# Altium PCB 自己修改盲文板.PcbDoc (part 3 of 4)
Units mm, origin at the board's own origin, x right, y up, seen from the top; angles counter-clockwise.
Board outline 152.4 x 101.6 mm, 4 copper layers (Top Layer, VCC, GND, Bottom Layer); 193 components, 524 nets, 1381 pads, 518 vias.
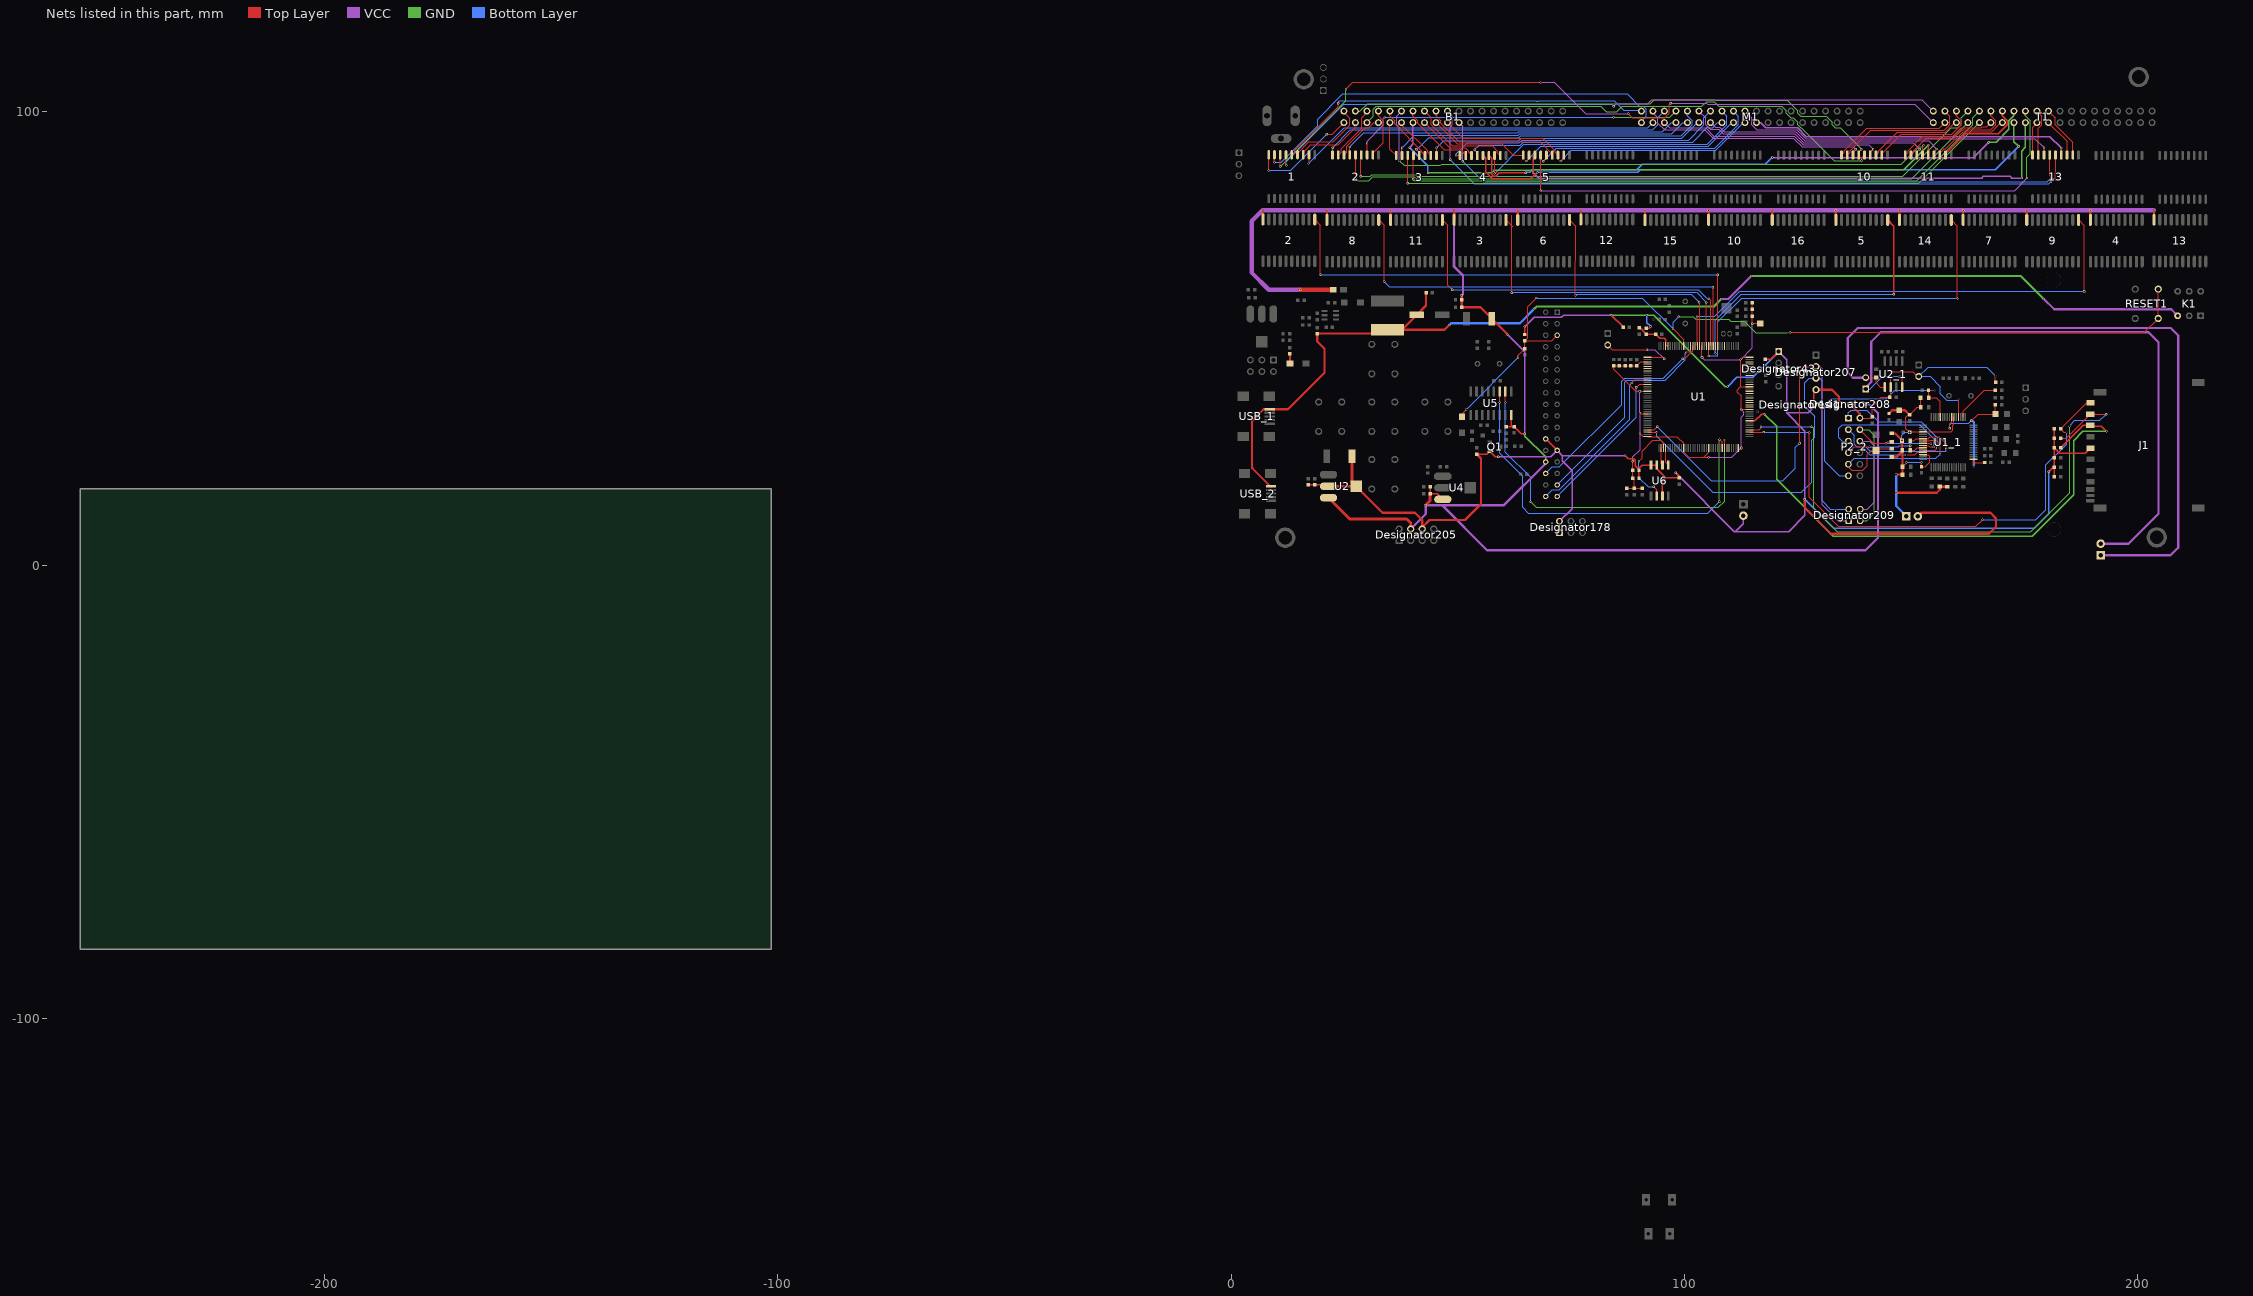
[diagram p5: the nets of this part, all layers, seen from the top]

## Via types
v1: diameter 0.5, hole 0.3, Top Layer to Bottom Layer, 463 vias
v2: diameter 0.5, hole 0.4, Top Layer to Bottom Layer, 48 vias
v3: diameter 1.27, hole 1.016, Top Layer to Bottom Layer, 2 vias
v4: diameter 1, hole 1, Top Layer to Bottom Layer, 2 vias
v5: diameter 3, hole 3, Top Layer to Bottom Layer, tented both sides, 2 vias
v6: diameter 0.8, hole 0.5, Top Layer to Bottom Layer, 1 vias

## Nets (pads, with @x,y where several pads share a name; then routed paths per layer and width w, separated by ;. In a path a pad name is that pad's centre, name@x,y a point inside that pad or via, vN(x,y) a via of type N, cw(c..) or ccw(c..) an arc to the next point about the centre after c; other vN are vias at no path point) (continued)
PA3: Designator135.2 U1.37 | length 17.5
  Top Layer w0.254: Designator135.2@83.058,48.514 84.074,47.498 v1(91.694,47.498) ; U1.37@91.823,45.812 95.158,45.812 v1(95.504,45.466)
  VCC w0.254: v1(91.694,47.498) 93.472,47.498 v1(95.504,45.466)
PA4: U1.40
PA5: U1.41
PA6: U1.42
PA7: U1.43
PA9: U1.101 U5.3 | length 88.5
  Top Layer w0.2: v1(59.207,35.839) U5.3@59.207,38.236 ; v1(107.696,27.686) 108.323,27.059 U1.101@108.323,25.812
  GND w0.254: v1(107.696,13.97) v1(107.696,27.686)
  Bottom Layer w0.2: v1(59.207,35.839) 59.207,24.613 64.262,19.558 64.262,12.7 65.532,11.43 105.156,11.43 v1(107.696,13.97)
PA10: U1.102 U5.2 | length 85.7
  Top Layer w0.2: v1(60.477,35.839) U5.2@60.477,38.236 ; U1.102@108.823,25.812 v1(108.823,27.575)
  GND w0.254: v1(66.04,13.97) 67.31,12.7 107.442,12.7 108.823,14.081 v1(108.823,27.575)
  Bottom Layer w0.2: v1(60.477,35.839) 60.477,24.867 66.04,19.304 v1(66.04,13.97)
PA11: U1.103
PA12: U1.104
PB1: Designator141.34 U1.47 | length 37.5
  Top Layer w0.2: v1(88.367,40.157) 89.021,40.812 U1.47@91.823,40.812
  Bottom Layer w0.2: Designator141.34@69.367,15.113 70.82,16.566 72.358,16.566 87.909,32.117 87.909,39.7 v1(88.367,40.157)
PB6: U1.136
PB9: U1.140
PB10: Designator207.2 Designator209.1 U1.69 | length 103.8
  Top Layer w0.254: U1.69@91.823,29.812 93.312,29.812 v1(93.98,30.48) ; v2(125.374,26.848) 125.374,42.85 126.263,43.739 Designator207.2@128.981,43.739
  VCC w0.254: Designator207.2@128.981,43.739 129.896,43.739 130.327,43.307 130.327,13.259 133.833,9.754 Designator209.1@136.195,9.754
  Bottom Layer w0.254: v1(93.98,30.48) 105.918,18.542 121.666,18.542 124.46,21.336 124.46,25.933 v2(125.374,26.848)
PB11: Designator207.3 Designator209.2 U1.70 | length 103.9
  Top Layer w0.254: U1.70@91.823,29.312 v1(93.828,29.312)
  Bottom Layer w0.254: v1(93.828,29.312) 93.828,28.346 106.172,16.002 125.73,16.002 128.016,18.288 128.016,27.534 128.702,28.219 128.702,32.791 126.517,34.976 126.517,40.183 127.533,41.199 Designator207.3@128.981,41.199 129.819,41.199 130.327,40.691 130.327,14.122 132.156,12.294 Designator209.2@136.195,12.294
PB13: U1.74 U6.6 | length 3.9
  Top Layer w0.2: U1.74@94.823,25.812 94.823,22.347 U6.6@95.123,22.047
PB14: U1.75 U6.2 | length 19.6
  Top Layer w0.2: v1(89.936,22.86) 90.656,23.581 90.656,25.124 93.017,27.485 94.742,27.485 95.25,26.977 95.25,25.885 U1.75@95.323,25.812 ; v1(93.218,17.272) 93.855,16.635 U6.2@93.855,15.189
  Bottom Layer w0.2: v1(89.936,22.86) 89.936,19.284 91.948,17.272 v1(93.218,17.272)
PB15: U1.76 U6.5 | length 4
  Top Layer w0.2: U1.76@95.823,25.812 95.823,22.617 U6.5@96.393,22.047
PC10: J1.9 R22.1 U1.111 | length 113.4
  Top Layer w0.2: U1.111@114.323,29.312 v1(117.45,29.312) ; v1(127.508,29.21) 127.508,14.986 133.934,8.56 164.262,8.56 v1(165.71,10.008) ; v2(184.252,29.312) 183.667,29.312 R22.1@182.931,30.048 188.674,35.791 J1.9@189.493,35.791
  Bottom Layer w0.2: v1(117.45,29.312) 127.406,29.312 v1(127.508,29.21) ; v1(165.71,10.008) 177.495,10.008 179.68,12.192 179.68,22.098 184.252,26.67 v2(184.252,29.312)
PC11: J1.1 R24.1 U1.112 | length 130.6
  Top Layer w0.254: U1.112@114.323,29.812 116.492,29.812 116.84,30.159 v1(116.84,30.48) ; R24.1@182.931,27.93 184.14,27.93 J1.1@189.484,33.274 192.964,33.274 v1(192.989,33.249)
  GND w0.254: v1(128.016,30.48) 128.168,30.48 128.499,30.15 128.499,12.573 133.706,7.366 176.301,7.366 184.912,15.977 v2(184.912,30.632)
  Bottom Layer w0.254: v1(116.84,30.48) v1(128.016,30.48) ; v2(184.912,30.632) 184.912,30.709 186.08,31.877 191.618,31.877 v1(192.989,33.249)
PC13: U1.7
PD2: J1.2 R25.1 U1.116 | length 126.6
  Top Layer w0.3: U1.116@114.323,31.812 115.505,31.812 116.967,33.274 v1(117.602,33.274) ; R25.1@182.931,25.811 187.904,30.785 J1.2@189.484,30.785 189.687,30.582 191.948,30.582 v1(193.04,29.489)
  GND w0.3: v1(117.602,33.274) 120.32,30.556 120.32,18.898 132.842,6.375 176.708,6.375 185.776,15.443 185.776,27.457 187.808,29.489 v1(193.04,29.489)
PD6: U1.122
PD7: U1.123
PE0: U1.141
PE1: U1.142
PE6: 
PF0: 2.11@18.44,76.203 U1.10 | length 116
  Top Layer w0.2: 2.11@18.44,76.203 19.685,74.958 v1(19.685,64.008) ; U1.10@107.34,48.329 v1(107.34,64.008)
  Bottom Layer w0.2: v1(19.685,64.008) v1(107.34,64.008)
PF1: 5.11@144.794,76.101 U1.11 | length 67.6
  Top Layer w0.2: v1@106.823,46.676 U1.11@106.823,48.312
  Top Layer w0.3: v1(106.807,46.66) v1@106.823,46.676 ; 5.11@144.794,76.101 146.152,74.743 v1@146.152,59.792
  Bottom Layer w0.2: v1(106.807,46.66) 106.807,54 112.497,59.69 v1(146.152,59.69)
PF2: 8.11@32.54,76.101 U1.12 | length 100.1
  Top Layer w0.2: 8.11@32.54,76.101 33.747,74.895 v1(33.747,62.519) ; v1(106.248,61.265) 106.323,61.19 U1.12@106.323,48.312
  Bottom Layer w0.2: v1(33.747,62.519) 34.908,61.358 v1@106.35,61.358
PF3: 11.11@46.572,76.101 U1.13 | length 84.3
  Top Layer w0.2: 11.11@46.572,76.101 47.752,74.921 47.752,61.722 v1(48.768,60.706) ; v1(105.385,58.699) 105.823,58.261 U1.13@105.823,48.312
  Bottom Layer w0.2: v1@48.768,60.731 102.997,60.731 105.029,58.699 v1(105.385,58.699)
PF4: 14.11@158.826,76.101 U1.14 | length 84.5
  Top Layer w0.2: v1@105.323,46.112 U1.14@105.323,48.312 ; 14.11@158.826,76.101 160.172,74.754 v1(160.172,58.801)
  Bottom Layer w0.2: v1(105.334,46.101) 107.29,46.101 107.357,46.168 107.357,53.611 112.598,58.852 v1@160.122,58.852
PF5: 3.11@60.604,76.101 U1.15 | length 72.7
  Top Layer w0.2: 3.11@60.604,76.101 62.154,74.551 ; v1(61.874,60.071) 61.9,60.096 61.9,77.091 ; v1(104.8,57.912) 104.8,48.334 U1.15@104.823,48.312
  Bottom Layer w0.2: v1(61.874,60.071) 61.925,60.122 102.591,60.122 ; 102.641,60.122 104.826,57.937 v1(104.8,57.912)
PF6: 6.11@74.636,76.101 U1.18 | length 55.1
  Top Layer w0.2: 6.11@74.636,76.101 74.636,75.986 75.946,74.676 v1(75.921,59.436) ; v1@103.302,57.963 103.302,48.333 U1.18@103.323,48.312
  Bottom Layer w0.2: v1(75.921,59.436) 76.175,59.69 101.49,59.69 v1@103.294,57.886
  other v1: 103.2,57.963
PF7: 9.11@186.889,76.101 pad.71 U1.19 | length 110.6
  Top Layer w0.2: v1@102.692,54.864 v1(102.75,54.806) 102.75,48.385 U1.19@102.823,48.312 ; 9.11@186.889,76.101 188.163,74.827 pad.71@188.163,60.342
  Bottom Layer w0.2: v1@102.743,54.813 106.655,54.813 112.183,60.342 pad.71@188.163,60.342
PF8: U1.20
PF9: Designator141.30 U1.21 | length 47.8
  Top Layer w0.2: v1(99.619,45.466) 100.071,45.466 101.823,47.218 U1.21@101.823,48.312
  Bottom Layer w0.2: Designator141.30@69.367,20.193 70.82,21.646 72.358,21.646 86.106,35.394 86.106,40.513 86.754,41.161 88.782,41.161 88.796,41.148 95.301,41.148 v1(99.619,45.466)
PF10: Designator141.31 U1.22 | length 48.2
  Top Layer w0.254: v1(100.33,46.888) 100.526,47.085 101.085,47.085 101.323,47.322 U1.22@101.323,48.312
  Bottom Layer w0.254: Designator141.31@71.907,17.653 86.843,32.588 86.843,40.361 87.216,40.734 88.606,40.734 88.619,40.721 95.69,40.721 100.196,45.227 100.196,46.754 v1(100.33,46.888)
PF11: Designator141.33 U1.49 | length 34
  Top Layer w0.2: v1(89.357,39.218) 89.392,39.218 90.069,39.895 90.525,39.895 90.608,39.812 U1.49@91.823,39.812
  Bottom Layer w0.2: Designator141.33@71.907,15.113 89.332,32.537 v1@89.332,39.116
PG6: 
PG9: U1.124
PG10: U1.125
PG11: U1.126
PG13: U1.128
PG14: U1.129
PG15: U1.132
"PWM AUDIO": 
PWR_IN: C19_1.1 C34_1.1 Designator208.2 P2_2.7 P3_2.2 RX1.1 U1_1.20 U2_1.6 | length 61.8
  Top Layer w0.254: P2_2.7@138.659,32.385 141.122,32.385 RX1.1@141.402,32.664 141.402,35.027 143.332,36.957 C34_1.1@145.263,36.957 145.44,37.135 U2_1.6@145.44,39.258 145.44,42.164 145.948,42.672 150.343,42.672 151.435,41.58 P3_2.2@151.638,41.58 ; U1_1.20@160.416,32.652 160.416,36.489 v2(160.426,36.5) ; v2(168.554,41.707) 168.554,40.335 C19_1.1@168.605,40.284
  Top Layer w0.5: Designator208.2@136.576,35.433 138.659,33.35 P2_2.7@138.659,32.385
  Bottom Layer w0.254: P3_2.2@151.638,41.58 P3_2.2@151.663,41.58 ; v2(160.426,36.5) 160.223,36.297 157.861,36.297 156.413,37.744 156.413,39.319 154.153,41.58 P3_2.2@151.663,41.58 ; v2(168.554,41.707) 166.599,43.663 153.746,43.663 P3_2.2@151.663,41.58
"RADIO L": 
"RADIO R": 
RDY: D1_1.2 P2_2.5 R9.2 U1_1.40 | length 41.4
  Top Layer w0.254: P2_2.5@136.119,22.225 136.119,21.641 136.906,20.853 139.268,20.853 140.335,21.92 140.335,24.409 141.15,25.225 D1_1.2@142.24,25.225 142.626,25.61 R9.2@145.736,25.61 ; U1_1.40@152.616,27.352 154.022,27.352 154.178,27.508 155.473,27.508 156.337,26.645 v2(156.337,24.435)
  Bottom Layer w0.254: P2_2.5@136.119,22.225 137.414,23.52 155.423,23.52 v2(156.337,24.435)
RES: 
RESET: C6.2 D7.1 Designator141.5 R1.1 RESET1.1 U1.25 | length 196.7
  Top Layer w0.2: D7.1@50.927,32.715 50.927,33.401 v1(51.816,34.29) ; v1(63.246,45.72) 63.246,46.188 C6.2@64.772,47.714 64.719,47.766 R1.1@64.719,49.454 ; v1(67.31,58.877) 65.402,56.969 65.402,50.157 64.719,49.474 R1.1@64.719,49.454 ; Designator141.5@71.907,50.673 70.688,49.454 R1.1@64.719,49.454 ; v1(97.46,52.095) 99.823,49.732 U1.25@99.823,48.312
  Top Layer w0.254: v1(123.317,51.283) 201.397,51.283 RESET1.1@204.47,54.356 RESET1.1@204.47,60.856
  GND w0.254: v1(98.704,54.788) 101.952,54.788 102.511,54.229 109.702,54.229 110.185,53.746 113.205,53.746 115.687,51.264 122.537,51.264 v1(123.317,51.283) ; 122.555,51.264 122.599,51.264
  Bottom Layer w0.2: v1(51.816,34.29) v1(63.246,45.72) ; v1(67.31,58.877) 90.678,58.877 v1(97.46,52.095) 97.46,53.543 v1(98.704,54.788)
RST: C20_1.1 P2_2.6 R30.2 U1_1.28 | length 53.7
  Top Layer w0.254: v2(155.118,38.506) C20_1.1@153.797,38.506 153.797,36.898 R30.2@153.83,36.865 155.515,36.865 156.416,35.964 U1_1.28@156.416,32.652
  Bottom Layer w0.254: P2_2.6@136.119,19.685 134.087,19.685 130.937,22.835 130.937,35.255 132.385,36.703 144.501,36.703 146.304,38.506 v2(155.118,38.506)
RXD: Designator209.4 P2_2.9 R11_1.2 U1_1.39 | length 50.4
  Top Layer w0.254: R11_1.2@149.74,27.391 150.581,27.391 151.042,27.852 U1_1.39@152.616,27.852 153.734,27.852 154.203,28.321 156.159,28.321 157.734,26.746 v2(157.734,25.502)
  VCC w0.254: P2_2.9@138.659,27.305 140.843,27.305 141.834,26.314 141.834,13.894 141.249,13.31 141.249,13.284 140.259,12.294 Designator209.4@138.735,12.294
  Bottom Layer w0.254: P2_2.9@138.659,27.305 140.894,25.07 157.582,25.07 157.734,25.222 v2(157.734,25.502)
SCLK: 
SDIN: 
SPI_CLK: P2_2.3 U1_1.42 | length 31.4
  Top Layer w0.254: U1_1.42@152.616,26.352 153.709,26.352 154.026,26.035 v2(154.94,26.035)
  Bottom Layer w0.254: P2_2.3@136.119,27.305 134.772,27.305 133.985,28.092 133.985,30.201 134.772,30.988 151.841,30.988 154.94,27.889 v2(154.94,26.035)
SPI_CS: P2_2.4 R14_1.2 U1_1.43 | length 18.3
  Top Layer w0.254: P2_2.4@136.119,24.765 137.465,26.111 v2(140.767,26.111) ; v2(149.766,26.297) R14_1.2@149.766,25.308 150.733,25.308 151.277,25.852 U1_1.43@152.616,25.852
  Bottom Layer w0.254: v2(140.767,26.111) 147.142,26.111 147.328,26.297 v2(149.766,26.297)
SPI_MISO: P2_2.2 U1_1.45 | length 20.2
  Top Layer w0.254: v2(148.921,24.284) 150.776,24.284 151.344,24.852 U1_1.45@152.616,24.852
  Bottom Layer w0.254: P2_2.2@136.119,29.845 137.389,28.575 137.389,26.619 137.973,26.035 139.116,26.035 140.867,24.284 v2(148.921,24.284)
SPI_MOSI: P2_2.1 U1_1.44 | length 29.1
  Top Layer w0.254: U1_1.44@152.616,25.352 155.298,25.352 v2(155.753,25.806)
  Bottom Layer w0.254: P2_2.1@136.119,32.385 136.119,33.528 136.728,34.138 140.208,34.138 142.773,31.572 152.222,31.572 155.753,28.042 v2(155.753,25.806)
SPKL: P4_2.1 P4_3.2 R31.2 U2_1.5 | length 156.8
  Top Layer w0.254: P4_3.2@139.972,41.344 R31.2@142.3,41.344 142.3,40.148 143.19,39.258 U2_1.5@144.17,39.258
  VCC w0.5: P4_3.2@139.954,41.326 137.16,41.326 135.992,42.494 135.992,50.063 138.176,52.248 207.239,52.248 208.864,50.622 208.864,3.835 207.188,2.159 P4_2.1@191.77,2.159
SPKN: P4_2.2 P4_3.1 U2_1.8 | length 140.6
  Top Layer w0.254: v2(147.32,41.656) 147.98,40.996 U2_1.8@147.98,39.258
  VCC w0.5: P4_3.1@139.954,38.786 139.954,39.141 141.173,40.361 141.173,49.251 143.256,51.333 202.336,51.333 204.521,49.149 204.521,11.303 197.917,4.699 P4_2.2@191.77,4.699
  Bottom Layer w0.254: P4_3.1@139.954,38.786 140.843,38.786 143.713,41.656 v2(147.32,41.656)
SS1: D4.1 R21.2 | length 2.1
  Top Layer w0.3: D4.1@12.952,44.452 D4.1@12.954,44.45
  Top Layer w0.5: D4.1@12.952,44.452 R21.2@12.952,46.545
TPAD: 
TXD: Designator209.3 P2_2.8 R6_1.2 U1_1.41 | length 44.9
  Top Layer w0.254: P2_2.8@138.659,29.845 141.652,26.852 v2(144.446,26.852) 144.816,27.222 R6_1.2@145.704,27.222 ; U1_1.41@152.616,26.852 154.276,26.852 154.356,26.772 v2(154.356,26.746)
  GND w0.254: P2_2.8@138.659,29.845 140.665,29.845 141.859,28.651 141.859,11.455 140.157,9.754 Designator209.3@138.735,9.754
  Bottom Layer w0.254: v2(144.446,26.852) 144.468,26.874 154.253,26.874 154.356,26.772 v2(154.356,26.746)
VCC3.3: C26.2 C41.1 C42.2 C44.2 C45.2 D6.2 Designator43.1 Designator141.24 Designator141.25 Designator178.1 Designator178.2 Designator205.6 Designator207.4 Designator208.1 J1.4 P3_1.2 P3_3.2 Q1.1 R1.2 R3.2 R6.1 R10.1 R11.1 R20.1 R22.2 R24.2 R25.2 R27.2 R28.2 U2.2 U2.4 U6.3 U6.7 U6.8 | length 476
  Top Layer w0.3: C45.2@17.042,17.667 C26.2@18.439,17.667 21.168,17.667 U2.2@21.461,17.374 ; R20.1@54.127,24.46 56.341,24.46 Q1.1@57.016,25.136 58.276,23.876 v1(58.928,23.876) ; R1.2@64.77,50.887 v1(64.77,52.578) ; Designator141.24@69.367,27.813 Designator141.25@71.907,25.273 ; Designator178.1@72.39,7.112 Designator178.2@72.39,9.652 ; v1(83.82,55.118) 86.424,52.514 C44.2@86.424,52.402 ; v1(86.868,24.13) 87.538,23.46 88.793,23.46 89.144,23.109 89.144,21.854 R10.1@89.941,21.057 ; R11.1@89.941,19.126 R10.1@89.941,20.93 R10.1@89.941,21.057 ; R3.2@91.594,52.261 92.215,52.261 v1(92.558,52.603) ; U6.3@95.125,15.189 95.125,18.518 95.834,19.228 ; v1(98.044,20.32) 98.806,19.558 C41.1@98.806,19.228 95.834,19.228 ; R6.1@117.78,45.364 119.05,45.364 Designator43.1@120.752,47.066 ; v1(128.524,34.798) 128.524,38.202 Designator207.4@128.981,38.659 ; v1(180.34,20.574) 181.342,21.576 R27.2@181.547,21.576 ; R28.2@181.547,19.458 R27.2@181.547,21.576 ; R22.2@181.547,30.05 R24.2@181.547,27.931 R25.2@181.547,25.813 ; J1.4@189.493,25.791 188.34,24.638 182.722,24.638 R25.2@181.547,25.813 ; R10.1@89.941,21.057 89.941,21.361 90.627,22.047 U6.8@92.583,22.047 U6.7@93.853,22.047 93.853,21.209 95.834,19.228 ; R27.2@181.547,21.576 C42.2@181.547,23.695 R25.2@181.547,25.813
  Top Layer w0.5: v1(126.492,14.478) 126.492,12.675 132.258,6.909 167.157,6.909 168.707,8.458 168.707,10.262 167.462,11.506 152.222,11.506 P3_3.2@151.46,10.744 ; Designator207.4@128.981,38.659 132.512,38.659 134.036,37.135 Designator208.1@134.036,35.433
  Top Layer w0.508: U2.2@21.461,17.374 U2.4@27.557,17.374 33.399,11.532 40.513,11.532 42.139,9.906 Designator205.6@42.139,8.306 ; Designator205.6@42.139,7.95 Designator205.6@42.139,8.306 ; R20.1@54.127,24.46 55.118,23.47 55.118,13.462 51.562,9.906 43.739,9.906 Designator205.6@42.139,8.306
  Top Layer w0.635: D6.2@26.67,23.953 26.67,18.261 U2.4@27.557,17.374
  VCC w0.3: v1(58.928,23.876) 70.51,23.876 71.907,25.273 73.05,24.13 ; v1(64.77,52.578) 66.808,54.616 72.84,54.616 73.342,55.118 v1(83.82,55.118) ; Designator141.24@69.342,27.838 Designator141.24@69.367,27.813 ; Designator178.2@72.39,9.652 75.184,12.446 75.184,20.828 73.05,22.962 73.05,24.13 ; v1(86.868,24.13) 73.05,24.13 ; v1(98.044,20.32) 110.998,7.366 111.227,7.366 ; P3_1.2@112.979,10.871 112.979,9.119 111.227,7.366 ; Designator43.1@120.752,47.066 122.504,45.314 122.504,33.53 ; v1(128.524,34.798) 127.256,33.53 122.504,33.53 ; 111.227,7.366 122.936,7.366 126.492,10.922 v1(126.492,14.478) 126.492,29.542 122.504,33.53
  GND w0.3: v1(83.82,55.118) v1(91.694,55.118) 93.218,55.118 108.966,39.37 v1(109.474,39.37)
  Bottom Layer w0.3: v1(91.694,55.118) 91.694,53.467 v1(92.558,52.603) ; v1(109.474,39.37) 111.506,41.402 115.087,41.402 Designator43.1@120.752,47.066 ; v1(126.492,14.478) 132.893,8.077 177.14,8.077 180.34,11.278 v1(180.34,20.574)
VCC3.3M: C11.1 C12.1 C13.1 C14.1 C15.1 C16.1 C17.1 C18.1 C19.1 C20.1 C21.1 D1.1 pad.15 pad.38 pad.41 R10.2 R11.2 U1.17 U1.39 U1.52 U1.62 U1.72 U1.84 U1.95 U1.108 U1.121 U1.131 U1.144 | length 128.4
  Top Layer w0.254: C16.1@87.249,16.916 C15.1@88.9,16.916 ; v1(88.544,22.86) 88.544,20.944 R10.2@88.557,20.931 R11.2@88.557,19.128 88.9,18.785 C15.1@88.9,16.916 ; v1(90.145,33.503) 90.336,33.312 U1.62@91.823,33.312 ; v1(90.17,28.981) 90.17,28.975 90.787,28.358 91.777,28.358 U1.72@91.823,28.312 98.312,28.312 99.823,26.801 U1.84@99.823,25.812 99.823,24.822 100.889,23.756 104.257,23.756 ; C17.1@90.678,16.916 C15.1@88.9,16.916 ; U1.52@91.823,38.312 90.102,38.312 pad.38@90.068,38.278 89.278,38.278 84.328,43.228 C18.1@84.328,43.942 C11.1@85.598,43.942 C12.1@88.138,43.942 89.383,43.942 C20.1@89.408,43.917 90.303,44.812 U1.39@91.823,44.812 ; pad.15@103.823,45.834 U1.17@103.823,48.312 ; v1@105.276,23.756 104.257,23.756 ; U1.95@105.323,25.812 105.323,24.822 104.257,23.756 ; U1.108@111.823,25.812 pad.41@112.491,25.812 ; v1(112.471,34.315) 112.471,37.284 111.64,38.115 111.64,38.593 112.313,39.266 ; v1@112.475,34.312 U1.121@114.323,34.312 ; U1.131@114.323,39.312 114.277,39.266 112.313,39.266 ; U1.144@114.323,45.812 112.842,45.812 v1(112.344,45.314) 112.344,39.297 112.313,39.266 ; C14.1@114.91,57.836 C19.1@114.91,56.388 C13.1@114.91,54.839 v1(114.91,53.188) 115.011,53.289 D1.1@116.688,53.289
  VCC w0.254: v1(88.544,22.86) 88.544,23.828 90.17,25.454 v1(90.17,28.981) 90.17,33.477 v1(90.145,33.503) pad.38@90.145,38.202 ; pad.15@103.835,45.822 104.343,45.314 v1(112.344,45.314) 114.91,47.879 v1(114.91,53.188) ; v1(105.283,23.749) 110.439,23.749 pad.41@112.497,25.806 112.497,32.56 113.048,33.111 113.048,33.738 v1(112.471,34.315)
VCC5: 2.20 3.20 4.20 5.20 6.20 7.20 8.20 9.20 10.20 11.20 12.20 13.20 14.20 15.20 16.20 C2.2 C27.2 C32.1 C34.2 C40.2 C43.1 D5.2 Designator141.28 Designator205.7 Designator208.3 F1.1 U2.3 U4.3 U5.16 | length 536.9
  Top Layer w0.3: C40.2@43.878,17.27 C34.2@43.878,15.746 45.415,15.746 U4.3@46.684,14.478 ; C32.1@60.681,30.48 61.595,30.48 ; U5.16@61.747,33.036 61.747,30.632 61.595,30.48 ; C43.1@62.357,30.48 61.595,30.48 ; C43.1@62.382,30.505 63.932,28.956 v1(64.77,28.956)
  Top Layer w0.5: v1(6.934,78.283) 7.01,78.207 2.20@7.01,76.203 ; 8.20@21.11,76.101 v1@21.11,78.254 ; v1(35.077,78.283) 35.142,78.218 11.20@35.142,76.101 ; 3.20@49.174,76.101 v1@49.174,78.233 ; v1@50.863,59.474 C2.2@50.863,58.495 C27.2@50.863,56.844 54.993,56.844 D5.2@57.48,54.356 v1@60.96,50.876 ; 6.20@63.206,76.101 v1@63.206,78.242 ; 12.20@77.14,76.203 v1@77.14,78.257 ; v1(91.262,78.257) 91.269,78.251 15.20@91.269,76.101 ; 10.20@105.301,76.101 v1@105.301,78.24 ; 16.20@119.332,76.101 v1@119.332,78.229 ; 5.20@133.364,76.101 v1@133.364,78.218 ; 14.20@147.396,76.101 v1@147.396,78.258 ; 7.20@161.427,76.101 v1@161.427,78.242 ; 9.20@175.459,76.101 175.459,78.253 v1(175.489,78.283) ; 4.20@189.491,76.101 v1@189.491,78.225 ; 13.20@203.53,76.126 v1@203.53,78.257
  Top Layer w0.635: U2.3@21.461,14.834 26.135,10.16 38.71,10.16 39.599,9.271 Designator205.7@39.599,7.95 ; v1(42.926,13.208) 43.878,14.16 C34.2@43.878,15.746
  Top Layer w1: v1(15.24,60.706) F1.1@22.522,60.706
  VCC w0.3: v1(60.96,50.8) 64.77,46.99 v1(64.77,28.956)
  VCC w0.5: Designator205.7@39.599,7.95 42.926,11.278 v1(42.926,13.208) 46.482,13.208 ; v1(49.124,78.283) 49.124,65.862 51.13,63.855 51.13,59.741 v1(50.876,59.487) ; Designator141.28@69.361,22.735 69.361,22.397 60.173,13.208 46.482,13.208 ; Designator208.3@139.116,35.433 140.691,35.433 142.646,33.477 142.646,6.02 139.852,3.226 56.464,3.226 46.482,13.208
  VCC w1: v1(15.24,60.706) 8.298,60.706 4.488,64.516 4.488,75.837 v1(6.934,78.283) v1(21.082,78.283) v1(35.077,78.283) v1(49.124,78.283) v1(63.246,78.283) v1(77.114,78.283) v1(119.278,78.283) v1(147.371,78.283) v1(175.489,78.283) v1(203.505,78.283)
  GND w0.3: v1(64.77,28.956) 64.77,28.448 69.367,23.851 Designator141.28@69.367,22.735
  other v1: 105.283,78.257 133.325,78.257 161.442,78.257 189.459,78.257
VDD12: C2_1.2 C8_1.1 C9_1.2 U1_1.1 U1_1.23 | length 31.5
  Top Layer w0.254: v2(158.471,30.175) 158.471,31.166 158.916,31.611 U1_1.23@158.916,32.652 ; v2(163.22,31.801) 164.719,33.299 C8_1.1@168.58,33.299 168.516,33.363 C9_1.2@168.516,35.333 ; U1_1.1@163.716,23.352 163.716,22.949 ; v2(163.855,21.615) 163.716,21.755 163.716,22.949 ; C2_1.2@166.154,22.608 164.057,22.608 163.716,22.949
  Bottom Layer w0.254: v2(158.471,30.175) 158.471,30.886 158.838,31.254 162.674,31.254 v2(163.22,31.801)
  Bottom Layer w0.5: v2(163.22,31.801) 163.474,31.801 163.855,31.42 v2(163.855,21.615)
VDD33: C1.2 C3_1.2 C4_1.1 C5.2 FB1.2 P3_3.1 R6_1.1 R8_1.1 R9.1 R11_1.1 R12_1.2 R14_1.1 R17_1.1 R18_1.1 R24_1.2 R30.1 U1_1.22 U1_1.36 U1_1.46 | length 78.9
  Top Layer w0.254: R17_1.1@148.057,21.717 148.947,22.608 v2(148.947,22.681) ; R30.1@152.03,36.865 152.063,36.832 R24_1.2@152.063,34.763 151.287,34.763 FB1.2@149.684,33.16 149.568,33.16 149.365,33.16 148.819,32.614 148.819,30.059 v2(149.619,29.259) 149.711,29.352 U1_1.36@152.616,29.352 158.816,29.352 159.156,29.693 159.156,30.785 159.416,31.044 U1_1.22@159.416,32.652 ; v2(152.249,22.681) C1.2@152.249,21.704 153.073,21.704 154.051,22.682 154.051,24.028 153.728,24.352 U1_1.46@152.616,24.352
  Top Layer w0.5: C5.2@145.086,33.414 145.785,34.112 C4_1.1@147.345,34.112 148.615,34.112 FB1.2@149.568,33.16 ; R6_1.1@145.704,29.022 146.442,29.022 v2(147.94,27.523) R11_1.1@147.94,27.391 147.94,25.333 R14_1.1@147.966,25.308 ; R9.1@145.736,23.81 146.721,23.81 147.966,25.055 R14_1.1@147.966,25.308 ; v2(146.66,15.951) 146.685,15.926 155.6,15.926 156.278,16.603 156.278,17.283 R8_1.1@157.953,17.283 ; v2(146.66,19.939) R18_1.1@148.057,19.939 R17_1.1@148.057,21.717 148.057,25.217 R14_1.1@147.966,25.308
  Bottom Layer w0.254: v2(147.94,27.523) 147.94,28.636 148.563,29.259 v2(149.619,29.259) ; v2(148.947,22.681) v2(152.249,22.681)
  Bottom Layer w0.5: v2(146.66,19.939) v2(146.66,15.951) 146.66,13.005 P3_3.1@148.92,10.744
VDDA: C9.2 C10.2 R3.1 U1.32 U1.33 | length 8.5
  Top Layer w0.3: C10.2@90.183,52.286 R3.1@91.592,50.876 C9.2@93.61,50.876 ; C9.2@93.612,50.878 94.502,49.987 95.504,49.987 95.8,49.691 U1.33@95.8,48.335 ; U1.33@95.823,48.312 U1.32@96.3,48.312
VDDAMP: 
VREF: C16_1.1 U1_1.18 | length 10.3
  Top Layer w0.254: U1_1.18@161.416,32.652 161.416,33.908 166.065,38.557 C16_1.1@168.554,38.557
VUSB: C28.1 C29.2 K1.3 L1.1 R16.1 USB_1.1 USB_2.1 | length 254.9
  Top Layer w0.5: USB_2.1@8.782,17.348 8.646,17.348 4.628,21.366 4.628,21.441 4.572,21.497 4.572,31.75 7.188,34.366 USB_1.1@8.528,34.366 12.522,34.366 20.574,42.418 20.574,47.716 18.999,49.291 R16.1@18.999,50.978 19.083,51.062 33.637,51.062 L1.1@34.468,51.892 L1.1@37.668,51.892 ; C29.2@42.989,60.073 42.989,57.213 C28.1@40.97,55.194 L1.1@37.668,51.892 ; v1(48.082,52.934) 47.041,51.892 L1.1@37.668,51.892
  VCC w0.5: v1(108.102,58.674) 109.644,58.674 v1(114.724,63.754) ; v1(179.24,58.674) 181.526,56.388 207.315,56.388 K1.3@208.737,54.966
  GND w0.5: v1(66.802,56.439) 66.802,56.464 67.375,57.037 106.466,57.037 v1(108.102,58.674) ; v1(114.724,63.754) 174.16,63.754 v1(179.24,58.674)
  Bottom Layer w0.5: v1(48.082,52.934) 48.489,53.34 63.703,53.34 v1(66.802,56.439)
W1: 1.18 B1.1 | length 24.4
  Top Layer w0.254: v1(8.28,87.02) 1.18@8.28,90.475 ; v1(21.082,94.996) 22.294,94.996 B1.1@24.859,97.561
  Bottom Layer w0.254: v1(8.28,87.02) 13.106,87.02 v1(21.082,94.996)
W2: 1.17 M1.1 | length 95.5
  Top Layer w0.254: v1(9.55,88.849) 1.17@9.55,90.475
  Bottom Layer w0.254: v1(9.55,88.849) 11.041,88.849 19.05,96.858 19.05,98.298 24.638,103.886 87.324,103.886 90.02,101.19 90.918,101.19 91.556,100.552 91.556,99.012 90.467,97.923 M1.1@90.467,97.561
W3: 1.16 T1.1 | length 163.4
  Top Layer w0.254: v1(10.82,87.884) 1.16@10.82,90.475 ; v1(25.316,104.902) 26.867,106.453 ; 26.799,106.453 26.867,106.453 ; v1@68.342,106.453 26.867,106.453 ; v1(87.546,99.568) 88.464,98.65 95.674,98.65 96.636,99.612 96.636,101.546 v1(96.944,101.854)
  VCC w0.254: v1(68.242,106.426) 71.29,106.426 78.148,99.568 v1(87.546,99.568) ; v1(96.944,101.854) 104.818,101.854 105.072,101.6 105.098,101.625 150.792,101.625 T1.1@154.856,97.561
  GND w0.254: v1(10.82,87.884) 25.316,102.38 v1(25.316,104.902)
W4: 1.15 T1.21 | length 152.9
  Top Layer w0.254: 1.15@12.09,90.475 12.09,88.24 v1(12.192,88.138)
  VCC w0.254: v1(84.35,101.19) 84.945,101.785 91.879,101.785 92.71,102.616 152.341,102.616 T1.21@154.856,100.101
  Bottom Layer w0.254: v1(12.192,88.138) 12.192,88.984 24.808,101.6 83.94,101.6 v1(84.35,101.19)
W5: 1.14 M1.21 | length 83.8
  Top Layer w0.254: 1.14@13.36,90.475 13.999,91.113 13.999,91.448 23.622,101.071 v1(23.622,101.854)
  Bottom Layer w0.254: v1(23.622,101.854) 23.622,102.108 23.876,102.362 67.256,102.362 67.3,102.318 67.778,102.318 67.821,102.362 84.498,102.362 86.53,100.33 90.238,100.33 M1.21@90.467,100.101
W6: 1.13 B1.21 | length 18.1
  Top Layer w0.2: 1.13@14.63,90.475 14.63,90.83 17.158,93.358 22.543,93.358 26.162,96.977 26.162,98.552 24.859,99.855 B1.21@24.859,100.101
W7: 1.12 B1.2 | length 15.4
  Top Layer w0.254: 1.12@15.9,90.475 15.9,91.084 17.526,92.71 23.622,92.71 27.399,96.487 B1.2@27.399,97.561
W8: 1.11 M1.2 | length 81.5
  Top Layer w0.254: v1@17.17,88.671 1.11@17.17,90.475
  Bottom Layer w0.254: v1(17.069,88.57) 24.968,96.469 91.915,96.469 M1.2@93.007,97.561
W9: 10.18@134.595,90.424 T1.2 | length 26
  Top Layer w0.254: 10.18@134.595,90.424 135.233,91.062 135.233,91.397 140.203,96.368 156.202,96.368 T1.2@157.396,97.561
W10: 10.17@135.865,90.424 T1.22 | length 29
  Top Layer w0.254: 10.17@135.865,90.424 136.503,91.062 136.503,91.397 141.019,95.914 157.288,95.914 158.485,97.11 158.485,99.012 T1.22@157.396,100.101
W11: 10.16@137.135,90.424 M1.22 | length 50.7
  Top Layer w0.254: 10.16@137.135,90.424 137.135,91.034 v1(137.77,91.669)
  VCC w0.254: M1.22@93.007,100.101 93.007,99.739 94.096,98.65 94.096,97.472 95.604,95.964 104.48,95.964 106.288,94.156 123.975,94.156 125.93,92.201 137.238,92.201 v1(137.77,91.669)
W12: 10.15@138.405,90.424 B1.22 | length 119.4
  Top Layer w0.254: 10.15@138.405,90.424 138.405,91.084 v1(139.04,91.719)
  GND w0.254: B1.22@27.399,100.101 28.399,100.101 30.083,101.785 92.387,101.785 93.258,102.656 106.701,102.656 106.843,102.514 122.614,102.514 124.938,100.19 124.938,99.65 125.576,99.012 131.196,99.012 132.558,97.65 132.558,97.11 133.196,96.472 134.287,96.472 v1(139.04,91.719)
W13: 10.14@139.675,90.424 B1.3 | length 120.4
  Top Layer w0.254: v1(139.065,89.205) 139.065,89.814 10.14@139.675,90.424
  GND w0.254: B1.3@29.939,97.561 31.39,99.012 31.39,100.552 32.028,101.19 81.537,101.19 82.753,99.974 84.988,99.974 86.204,101.19 103.832,101.19 104.844,102.202 106.513,102.202 107.525,101.19 121.398,101.19 122.398,100.19 122.398,99.65 123.398,98.65 123.938,98.65 124.938,97.65 124.938,97.11 125.576,96.472 125.727,96.472 132.994,89.205 v1(139.065,89.205)
W14: 10.13@140.945,90.424 M1.3 | length 50
  Top Layer w0.254: 10.13@140.945,90.424 140.945,91.084 v1(141.58,91.719)
  VCC w0.254: M1.3@95.547,97.561 96.69,96.418 104.668,96.418 106.476,94.61 124.163,94.61 126.118,92.655 140.644,92.655 v1(141.58,91.719)
W15: 10.12@142.215,90.424 T1.3 | length 20.9
  Top Layer w0.254: 10.12@142.215,90.424 142.853,91.062 142.853,91.397 146.915,95.46 157.477,95.46 159.578,97.561 T1.3@159.936,97.561
W16: 10.11@143.485,90.424 T1.23 | length 23.9
  Top Layer w0.254: 10.11@143.485,90.424 143.678,90.617 143.678,90.952 147.731,95.006 158.92,95.006 161.025,97.11 161.025,98.012 159.936,99.101 T1.23@159.936,100.101
W17: 2.18@22.352,90.449 M1.23 | length 79
  Top Layer w0.254: 2.18@22.352,90.449 22.352,92.024 v1(22.377,92.05)
  Bottom Layer w0.254: v1(22.377,92.05) 26.317,95.99 92.975,95.99 94.096,97.11 94.096,98.65 M1.23@95.547,100.101
W18: 2.17@23.622,90.449 B1.23 | length 12.3
  Top Layer w0.254: 2.17@23.622,90.449 24.26,91.088 24.26,91.792 28.85,96.382 28.85,98.65 29.939,99.739 B1.23@29.939,100.101
W19: 2.16@24.892,90.449 B1.4 | length 11.3
  Top Layer w0.254: 2.16@24.892,90.449 25.53,91.088 25.53,92.408 29.594,96.472 30.39,96.472 31.479,97.561 B1.4@32.479,97.561
W20: 2.15@26.162,90.449 M1.4 | length 75.9
  Top Layer w0.254: 2.15@26.162,90.449 v1(26.162,92.202)
  Bottom Layer w0.254: v1(26.162,92.202) 29.286,95.326 63.229,95.326 63.438,95.536 95.061,95.536 97.087,97.561 M1.4@98.087,97.561
W21: 2.14@27.432,90.449 T1.4 | length 146.1
  Top Layer w0.254: v1(27.421,85.192) 27.432,85.203 2.14@27.432,90.449
  GND w0.254: v1(27.421,85.192) 27.82,84.792 30.393,84.792 31.242,85.642 40.422,85.642 40.875,85.188 150.103,85.188 T1.4@162.476,97.561
W22: 2.13@28.702,90.449 T1.24 | length 145.8
  Top Layer w0.254: v1(28.55,85.75) 28.55,90.297 2.13@28.702,90.449
  GND w0.254: v1(28.55,85.75) 30.709,85.75 31.054,86.096 40.617,86.096 40.98,85.732 148.107,85.732 158.847,96.472 160.387,96.472 161.025,97.11 161.025,98.65 T1.24@162.476,100.101
W23: 2.12@29.972,90.449 M1.24 | length 74.7
  Top Layer w0.254: 2.12@29.972,90.449 v1(29.972,92.939)
  VCC w0.254: v1(29.972,92.939) 29.972,93.514 33.568,97.11 33.568,98.389 v1(33.858,98.679)
  GND w0.254: v1(84.328,98.748) 96.734,98.748 M1.24@98.087,100.101
  Bottom Layer w0.254: v1(33.858,98.679) 33.927,98.748 v1(84.328,98.748)
W24: 2.11@31.242,90.449 B1.24 | length 11.1
  Top Layer w0.254: 2.11@31.242,90.449 31.242,90.784 33.568,93.11 33.568,98.012 32.479,99.101 B1.24@32.479,100.101
W25: 3.18@36.398,90.348 B1.5 | length 7.8
  Top Layer w0.254: B1.5@35.019,97.561 35.019,91.727 3.18@36.398,90.348
W26: 3.17@37.668,90.348 M1.5 | length 66.9
  Top Layer w0.254: 3.17@37.668,90.348 37.668,92.024 v1(37.694,92.05)
  Bottom Layer w0.254: v1(37.694,92.05) 40.386,94.742 63.287,94.742 63.627,95.082 97.147,95.082 99.627,97.561 M1.5@100.627,97.561
W27: 3.16@38.938,90.348 T1.5 | length 137.8
  Top Layer w0.254: v1(38.938,84.176) 3.16@38.938,90.348
  GND w0.254: v1(38.938,84.176) 38.964,84.15 151.605,84.15 T1.5@165.016,97.561
W28: 3.15@40.208,90.348 T1.25 | length 137.5
  Top Layer w0.254: v1(40.183,85.065) 40.208,85.09 3.15@40.208,90.348
  GND w0.254: v1(40.183,85.065) 40.513,84.734 151.189,84.734 163.565,97.11 163.565,98.65 T1.25@165.016,100.101
W29: 3.14@41.478,90.348 M1.25 | length 68.2
  Top Layer w0.254: v1(40.843,91.669) 41.478,91.034 3.14@41.478,90.348
  Bottom Layer w0.254: v1(40.843,91.669) 41.046,91.669 43.561,94.183 63.37,94.183 63.815,94.628 99.233,94.628 101.716,97.11 101.716,98.012 100.627,99.101 M1.25@100.627,100.101
W30: 3.13@42.748,90.348 B1.25 | length 13
  Top Layer w0.2: B1.25@35.019,100.101 35.019,99.063 36.081,98.001 36.081,97.312 42.083,91.31 42.083,91.013 3.13@42.748,90.348
W31: 3.12@44.018,90.348 B1.6 | length 9.9
  Top Layer w0.254: B1.6@37.559,97.561 37.559,97.142 43.38,91.321 43.38,90.986 3.12@44.018,90.348
W32: 3.11@45.288,90.348 M1.6 | length 61.8
  Top Layer w0.254: 3.11@45.288,90.348 v1(45.288,91.999)
  Bottom Layer w0.254: v1(45.288,91.999) 46.914,93.624 63.453,93.624 64.003,94.174 99.422,94.174 102.809,97.561 M1.6@103.167,97.561
W33: 11.18@148.666,90.424 T1.6 | length 22
  Top Layer w0.254: 11.18@148.666,90.424 149.304,91.062 149.304,91.397 152.459,94.552 159.109,94.552 161.029,96.472 165.467,96.472 165.642,96.647 166.642,96.647 T1.6@167.556,97.561
W34: 11.17@149.936,90.424 T1.26 | length 25.1
  Top Layer w0.254: 11.17@149.936,90.424 150.574,91.062 150.574,91.397 153.275,94.098 159.297,94.098 161.217,96.018 167.553,96.018 168.645,97.11 168.645,98.012 167.556,99.101 T1.26@167.556,100.101
W35: 11.16@151.206,90.424 M1.26 | length 54.6
  Top Layer w0.254: 11.16@151.206,90.424 151.206,91.084 v1(151.841,91.719)
  VCC w0.254: M1.26@103.167,100.101 104.618,98.65 104.618,97.11 105.637,96.091 107.535,96.091 108.562,95.064 124.351,95.064 126.306,93.109 150.452,93.109 v1(151.841,91.719)
W36: 11.15@152.476,90.424 B1.26 | length 131.8
  Top Layer w0.254: 11.15@152.476,90.424 152.476,92.38 v1(152.679,92.583)
  VCC w0.254: v1(37.109,89.129) 37.109,96.471 36.47,97.11 36.47,99.012 B1.26@37.559,100.101
  GND w0.254: v1(37.109,89.129) 38.125,88.113 46.072,88.113 46.395,88.436 147.741,88.436 151.602,92.296 152.393,92.296 v1(152.679,92.583)
W37: 11.14@153.746,90.424 B1.7 | length 128.2
  Top Layer w0.3: 11.14@153.746,90.424 153.746,92.583 v1(153.797,92.634)
  VCC w0.3: v1(39.37,92.05) 40.099,92.778 B1.7@40.099,97.561
  GND w0.3: v1@43.409,86.487 57.394,86.487 58.019,87.112 66.299,87.112 66.35,87.163 68.062,87.163 68.069,87.157 148.32,87.157 v1(153.797,92.634)
  Bottom Layer w0.3: v1(39.37,92.05) 43.409,88.011 v1(43.409,86.462)
W38: 11.13@155.016,90.424 M1.7 | length 53.9
  Top Layer w0.254: 11.13@155.016,90.424 155.016,91.135 v1(155.626,91.745)
  VCC w0.254: M1.7@105.707,97.561 106.723,96.545 107.723,96.545 108.75,95.518 124.539,95.518 126.494,93.563 153.808,93.563 v1(155.626,91.745)
W39: 11.12@156.286,90.424 T1.7 | length 17
  Top Layer w0.254: 11.12@156.286,90.424 156.286,90.759 157.295,91.767 157.629,91.767 161.426,95.564 167.741,95.564 169.738,97.561 T1.7@170.096,97.561
W40: 11.11@157.556,90.424 T1.27 | length 20.1
  Top Layer w0.3: 11.11@157.556,90.424 157.726,90.594 157.726,90.961 161.852,95.087 169.195,95.087 171.208,97.101 171.208,98.022 170.096,99.134 T1.27@170.096,100.101
W41: 4.18@50.47,90.322 M1.27 | length 62.1
  Top Layer w0.254: v1(49.581,90.322) 4.18@50.47,90.322
  Bottom Layer w0.254: v1(49.581,90.322) 49.581,90.576 52.121,93.116 63.587,93.116 64.191,93.72 100.865,93.72 104.256,97.11 104.256,98.65 M1.27@105.707,100.101
W42: 4.17@51.74,90.322 B1.27 | length 16.8
  Top Layer w0.2: B1.27@40.099,100.101 40.099,99.063 41.161,98.001 41.161,97.447 46.969,91.638 50.72,91.638 51.075,91.284 51.075,90.988 4.17@51.74,90.322
W43: 4.16@53.01,90.322 B1.8 | length 13.5
  Top Layer w0.2: B1.8@42.639,97.561 48.162,92.038 51.59,92.038 52.345,91.284 52.345,90.988 4.16@53.01,90.322
W44: 4.15@54.28,90.322 M1.8 | length 58.7
  Top Layer w0.254: v1(53.645,91.592) 54.28,90.957 4.15@54.28,90.322
  Bottom Layer w0.254: v1(53.645,91.592) 54.661,92.608 63.722,92.608 64.379,93.266 101.775,93.266 105.119,96.61 105.256,96.472 106.158,96.472 107.247,97.561 M1.8@108.247,97.561
W45: 4.14@55.55,90.322 T1.8 | length 130.6
  Top Layer w0.3: 4.14@55.55,90.322 56.165,89.707 56.165,86.704 57.634,85.235 66.119,85.235 67.447,86.563 v1(67.488,86.563)
  GND w0.3: T1.8@172.636,97.561 172.636,93.378 v1(173.685,92.329)
  Bottom Layer w0.3: v1(67.488,86.563) 67.513,86.589 89.626,86.589 90.175,87.138 91.018,87.138 91.024,87.132 168.488,87.132 v1(173.685,92.329)
W46: 4.13@56.82,90.322 T1.28 | length 127.5
  Top Layer w0.3: 4.13@56.82,90.322 57.435,89.707 57.435,86.141 57.841,85.735 58.338,85.735 59.116,86.512 v1(64.948,86.512)
  VCC w0.3: v1@119.405,89.865 163.652,89.865 v1(167.056,93.269)
  GND w0.3: v1(167.056,93.269) 168.732,93.269 171.524,96.061 171.524,98.022 172.636,99.134 T1.28@172.636,100.101
  Bottom Layer w0.3: v1(64.948,86.512) 65.1,86.665 65.852,86.665 66.376,87.189 88.213,87.189 88.245,87.157 89.488,87.157 90.688,88.357 117.821,88.357 v1(119.38,89.916)
W47: 4.12@58.09,90.322 M1.28 | length 63.1
  Top Layer w0.254: v1(58.09,86.335) 4.12@58.09,90.322
  Bottom Layer w0.254: v1(58.09,86.335) 64.567,92.812 105.037,92.812 109.336,97.11 109.336,99.012 M1.28@108.247,100.101
W48: 4.11@59.36,90.322 B1.28 | length 21.9
  Top Layer w0.254: B1.28@42.639,100.101 44.09,98.65 44.09,97.11 48.735,92.465 57.551,92.465 58.722,91.295 58.722,90.961 4.11@59.36,90.322
W49: 5.18@64.44,90.399 B1.9 | length 22.2
  Top Layer w0.254: B1.9@45.179,97.561 49.821,92.919 59.637,92.919 62.158,90.399 5.18@64.44,90.399
W50: 5.17@65.71,90.399 M1.9 | length 50.8
  Top Layer w0.254: v1(65.075,89.103) 65.71,89.738 5.17@65.71,90.399
  Bottom Layer w0.254: v1(65.075,89.103) 68.329,92.358 105.226,92.358 110.429,97.561 M1.9@110.787,97.561
W51: 5.16@66.98,90.399 T1.9 | length 125.2
  Top Layer w0.3: v1(66.573,86.538) 66.573,89.992 5.16@66.98,90.399
  VCC w0.3: v1(66.573,86.538) 67.808,85.303 165.501,85.303 165.888,85.69 171.826,85.69 172.172,85.344 v1(174.396,85.344)
  GND w0.3: v1(174.396,85.344) 174.396,91.303 175.176,92.083 T1.9@175.176,97.561
W52: 5.15@68.25,90.399 T1.29 | length 131.7
  Top Layer w0.254: 5.15@68.25,90.399 68.25,82.626 v1(68.301,82.575)
  VCC w0.254: v1(68.301,82.575) 172.774,82.575 175.514,85.315 v1(175.514,85.369)
  GND w0.254: T1.29@175.176,100.101 175.176,99.101 176.265,98.012 176.265,97.11 176.225,97.07 176.225,90.678 175.514,89.967 v1(175.514,85.369)
W53: 5.14@69.52,90.399 M1.29 | length 51.4
  Top Layer w0.254: v1(68.834,89.078) 69.52,89.764 5.14@69.52,90.399
  Bottom Layer w0.254: v1(68.834,89.078) 71.66,91.904 106.669,91.904 111.876,97.11 111.876,99.012 M1.29@110.787,100.101
W54: 5.13@70.79,90.399 B1.29 | length 30.4
  Top Layer w0.2: B1.29@45.179,100.101 45.179,99.063 46.241,98.001 46.241,97.396 50.291,93.346 59.814,93.346 59.816,93.345 68.14,93.345 5.13@70.757,90.729
W55: 5.12@72.06,90.399 B1.10 | length 27.5
  Top Layer w0.254: B1.10@47.719,97.561 51.198,94.082 68.711,94.082 71.422,91.371 71.422,91.037 5.12@72.06,90.399
W56: 5.11@73.33,90.399 M1.10 | length 45.8
  Top Layer w0.254: v1(72.644,89.103) 73.33,89.789 5.11@73.33,90.399
  Bottom Layer w0.254: v1(72.644,89.103) 74.99,91.45 106.858,91.45 112.969,97.561 M1.10@113.327,97.561
W57: 13.18@176.733,90.424 T1.10 | length 7.5
  Top Layer w0.254: 13.18@176.733,90.424 176.733,96.578 T1.10@177.716,97.561
W58: 13.17@178.003,90.424 T1.30 | length 10.5
  Top Layer w0.254: T1.30@177.716,100.101 178.805,99.012 178.805,97.11 178.003,96.308 13.17@178.003,90.424
W59: 13.16@179.273,90.424 M1.30 | length 71.8
  Top Layer w0.254: 13.16@179.273,90.424 v1(179.273,92.024)
  VCC w0.254: M1.30@113.327,100.101 114.778,98.65 114.778,97.11 115.916,95.972 124.727,95.972 126.682,94.017 177.281,94.017 v1(179.273,92.024)
W60: 13.15@180.543,90.424 B1.30 | length 152.3
  Top Layer w0.254: 13.15@180.543,90.424 180.543,86.004 180.746,85.801 v1(180.746,84.48)
  VCC w0.254: B1.30@47.719,100.101 48.808,99.012 48.808,97.11 48.311,96.613 v1(48.311,89.357)
  Bottom Layer w0.254: v1(48.311,89.357) 53.619,84.049 130.553,84.049 130.571,84.067 131.049,84.067 131.067,84.049 180.315,84.049 v1(180.746,84.48)
W61: 13.14@181.813,90.424 B1.11 | length 147.3
  Top Layer w0.254: v1(181.788,85.014) 181.788,86.512 181.813,86.538 13.14@181.813,90.424
  VCC w0.254: B1.11@50.259,97.561 51.054,96.766 v1(51.054,89.078)
  Bottom Layer w0.254: v1(51.054,89.078) 55.629,84.503 130.365,84.503 130.383,84.521 131.237,84.521 131.255,84.503 179.93,84.503 180.732,85.304 181.498,85.304 v1(181.788,85.014)
W62: 13.13@183.083,90.424 M1.11 | length 71.1
  Top Layer w0.3: 13.13@183.083,90.424 v1(183.083,91.973)
  VCC w0.3: M1.11@115.867,97.561 116.834,97.561 117.946,96.449 124.924,96.449 126.88,94.494 180.563,94.494 v1(183.083,91.973)
W63: 13.12@184.353,90.424 T1.11 | length 8.8
  Top Layer w0.254: T1.11@180.256,97.561 184.353,93.464 13.12@184.353,90.424
W64: 13.11@185.623,90.424 T1.31 | length 11.9
  Top Layer w0.254: T1.31@180.256,100.101 181.707,98.65 181.707,97.11 185.623,93.194 13.11@185.623,90.424